# Altium PCB LiFi_transmitter.PcbDoc
Units mil, origin at the board's own origin, x right, y up, seen from the top; angles counter-clockwise.
Board outline 755 x 565 mil, 2 copper layers (Top Layer, Bottom Layer); 24 components, 17 nets, 80 pads, 18 vias.
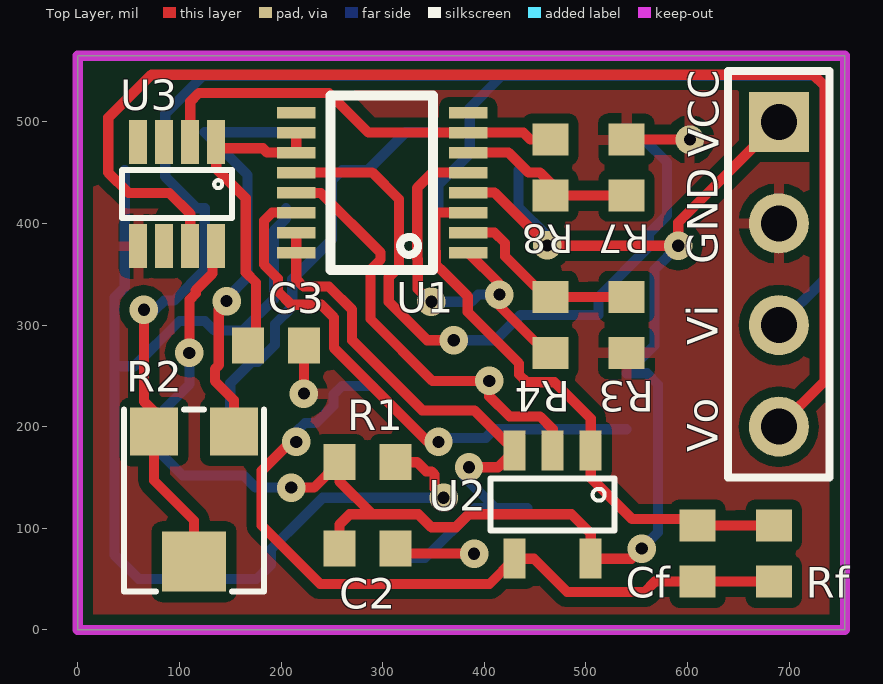
[diagram p0: Top Layer view]
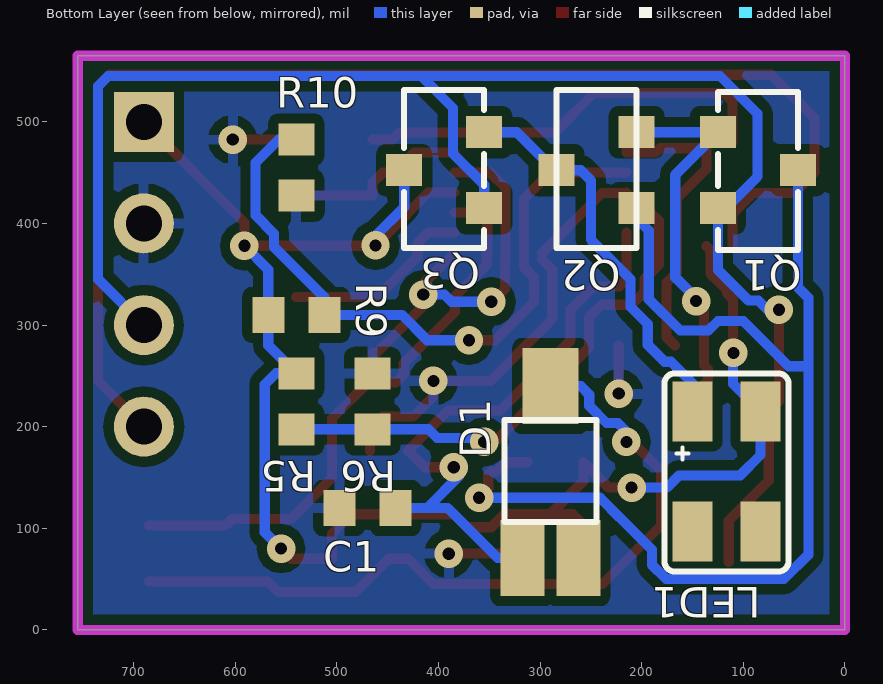
[diagram p1: Bottom Layer view, seen from below]

## Layer stack, top to bottom
Top Solder: solder mask 0.4, Solder Resist, Dk 3.5
Top Layer: signal copper 1.4
Dielectric 1: dielectric 12.6, FR-4, Dk 4.8
Bottom Layer: signal copper 1.4
Bottom Solder: solder mask 0.4, Solder Resist, Dk 3.5

## Board outline
0,0 755,0 755,565 0,565

## Design rules (kind name [scope] priority, off if disabled: settings)
Clearance [All] p1: gap=10 ignorepadtopadclearanceinfootprint=FALSE except(0: Arc-Hole Track-Hole SMDPad-Hole THPad-Hole Via-Hole Fill-Hole Poly-Hole Region-Hole Text-Hole; 6: SMDPad-SMDPad; 8: Arc-Arc Arc-Track Arc-SMDPad Track-Track Track-SMDPad)
PolygonConnect [All] p1: connectstyle=Relief reliefconductorwidth=10 reliefentries=4 polygonreliefangle="90 Angle" airgapwidth=10
RoomDefinition LiFi_transmitter [InComponentClass('LiFi_transmitter')] p1: confinementstyle=ConfineIn formatcopy=TRUE lockcomponents=FALSE outline 0,0 755,0 755,565 0,565
RoutingVias [All] p1: holewidth=12 width=28 viastyle="Through Hole" minholewidth=12 minwidth=28 maxholewidth=28 maxwidth=50
SolderMaskExpansion [All] p1: expansion=4
Width [All] p1: maxlimit=10 minlimit=10 preferedwidth=10
30 further rules are at their usual default settings.

## Components (designator, comment, footprint, x,y, rotation, side; value= is the part's Value field where it differs from the comment)
C1 "Cap" 1608[0603] 470,120 r180 bottom value=1uF
C2 "Cap" 1608[0603] 285,80 r180 top value=1uF
C3 "Cap" 1608[0603] 195,280 r180 top value=1uF
Cf "Cap" 1608[0603] 610,75 r90 top value=0.21pF
D1 "SFH2400FA" SFH2400FA 290,240 r270 bottom
LED1 "SFH4250S" SFH4250S 150,215 r0 bottom
Q1 "MMBTA06L" MMBTA06L 125,489.8 r270 bottom
Q2 "MMBTA06L" MMBTA06L 205,415 r90 bottom
Q3 "MMBTA06L" MMBTA06L 355,415 r90 bottom
R1 "Res1" 1608[0603] 285,165 r180 top value=10K
R2 "TRIMPOT" TC33 153.74,195 r180 top
R3 "Res1" 1608[0603] 540,300 r90 top value=10K
R4 "Res1" 1608[0603] 465,300 r90 top value=20K
R5 "Res1" 1608[0603] 540,225 r90 bottom value=10K
R6 "Res1" 1608[0603] 465,225 r270 bottom value=10K
R7 "Res1" 1608[0603] 540,455 r270 top value=10K
R8 "Res1" 1608[0603] 465,455 r270 top value=20K
R9 "Res1" 1608[0603] 540,310 r0 bottom value=9.7K
R10 "Res1" 1608[0603] 540,455 r90 bottom value=10.3K
Rf "Res1" 1608[0603] 685,75 r90 top value=10K
U1 "LTC6254" LTC6254 384.29,371.26 r90 top
U2 "LMH6629" LMV793 504.8,176.3 r180 top
U3 "TLV3502" TLV3502 136.18,480 r180 top
VCC "Header 4" HDR1X4 690,500 r270 top

## Footprints (in the part's own frame and the unit in brackets; to place one, negate y for a bottom-side part, rotate by r counter-clockwise, add the part's x,y. Pads: shape width x height; smd on the part's side, far side on the other; paste and mask are expansions set on the pad)
1608[0603] [mm] "Chip Capacitor, Body 1.6x0.8mm, IPC High Density"
  rect 0.8x0.9 smd: 1(-0.7,0) 2(0.7,0)
  body extent -0.87,-0.48 0.87,0.48, height 1.3
HDR1X4 [mm] "Connector; Header; 4 Position"
  rect 1.5x1.5 hole 0.9: 1(0,0)
  round 1.5 hole 0.9: 2(2.54,0) 3(5.08,0) 4(7.62,0)
  silkscreen extent -1.27,-1.27 8.89,1.27
LMV793 [mm] "88 MHz, Low Noise, 1.8V CMOS Input, Decompensated Operational Amplifiers"
  rect 0.55x1 smd mask+0.07: 1(0,0) 2(0.95,0) 3(1.9,0) 4(1.9,2.7) 5(0,2.7)
  silkscreen extent -0.6,0.7 2.5,2, body extent -0.5,-0.05 2.4,2.75, height 1.2
LTC6254 [mil] "720MHz, 3.5mA Power Efficient Rail-to-Rail I/O Op Amps"
  rect 11x37.52 smd mask+1.97: 1(0,0) 2(19.69,0) 3(39.37,0) 4(59.06,0) 5(78.74,0) 6(98.43,0) 7(118.11,0) 8(137.8,0) 9(137.8,169.29) 10(118.11,169.29) 11(98.43,169.29) 12(78.74,169.29) 13(59.06,169.29) 14(39.37,169.29) 15(19.69,169.29) 16(0,169.29)
  silkscreen extent -17,35 155,135
MMBTA06L [mm] "Bipolar (BJT) Transistor NPN 80V 500mA 100MHz 225mW Surface Mount SOT-23-3 (TO-236)"
  rect 0.8x0.9 smd mask+0.05: 1(0,0) 2(1.9,0) 3(0.95,2)
  silkscreen extent -1,0 2.95,2
SFH2400FA [mm] "Photodiode 900nm 5ns 120° 3-SMD, Gull Wing"
  rect 1.9x1.4 smd mask+0.08: 1(0,0)
  rect 1.9x1.1 smd mask+0.08: 2(4.3,0.7) 3(4.3,-0.7)
  silkscreen extent 0.85,-1.15 3.4,1.15
SFH4250S [mm] "Infrared (IR) Emitter 860nm 3.1V 100mA 30mW/sr @ 100mA 120° 4-PLCC"
  rect 1x1.5 smd mask+0.05: 1(0,0) 2(-1.7,0) 3(-1.7,3) 4(0,3)
  silkscreen extent -2.4,-0.95 0.7,4
TC33 [mm] "TRIMMER 100 OHM TO 1 MOMH 0.1W SMD"
  rect 1.2x1.2 smd mask+0.05: 1(0,0) 3(2,0)
  rect 1.6x1.5 smd mask+0.05: 2(1,3.25)
  silkscreen extent -0.75,-0.55 2.75,4
TLV3502 [mm] "4.5-ns, Rail-to-Rail, High-Speed Comparator in Microsize Packages"
  rect 0.45x1.1 smd mask+0.05: 1(0,0) 2(0.65,0) 3(1.3,0) 4(1.95,0) 5(1.95,2.6) 6(1.3,2.6) 7(0.65,2.6) 8(0,2.6)
  silkscreen extent -0.4,0.7 2.35,1.9

## Part data
C1 C2 C3 Cf: "Capacitor", LatestRevisionDate=17-Jul-2002, LatestRevisionNote="Re-released for DXP Platform.", PackageDescription="Radial Cap, Thru-Hole; 2 Leads; 0.3 in Pin Spacing", PackageReference=RAD-0.3, Published=8-Jun-2000, Publisher="Altium Limited"
D1: "Photodiode 900nm 5ns 120° 3-SMD, Gull Wing"
LED1: "Infrared (IR) Emitter 860nm 3.1V 100mA 30mW/sr @ 100mA 120° 4-PLCC"
Q1 Q2 Q3: "Bipolar (BJT) Transistor NPN 80V 500mA 100MHz 225mW Surface Mount SOT-23-3 (TO-236)"
R1 R3 R4 R5 R6 R7 R8 R9 R10 Rf: "Resistor", LatestRevisionDate=17-Jul-2002, LatestRevisionNote="Re-released for DXP Platform.", PackageDescription="Axial Device, Thru-Hole; 2 Leads; 0.3 in Pin Spacing", PackageReference=AXIAL-0.3, Published=8-Jun-2000, Publisher="Altium Limited"
R2: library part TC33, "TRIMMER 100 OHM TO 1 MOHM 0.1W SMD"
U1: "IC OPAMP GP 720MHZ RRO 16MSOP"
U2: "IC OPAMP VFB 1GHZ SOT23-5"
U3: "4.5-ns Rail-to-Rail High-Speed Comparator", Code_JEDEC=MO-001-AN, ComponentLink1Description="Manufacturer Link", ComponentLink1URL=http://www.ti.com/, ComponentLink2Description=Datasheet, ComponentLink2URL=http://www-s.ti.com/sc/ds/lf353.pdf, DatasheetVersion=Aug-1994, LatestRevisionDate=04-Mar-2005, LatestRevisionNote="Stylized 3D Model Added.", PackageDescription="DIP; 8 Leads; Row Spacing 7.62 mm; Pitch 2.54 mm", PackageReference=P008, PackageVersion=Jun-1999, Published=16-Jan-2001, Publisher="Altium Limited"
VCC: "Header, 4-Pin", LatestRevisionDate=17-Jul-2002, LatestRevisionNote="Re-released for DXP Platform.", Publisher="Altium Limited"

## Via types
v1: diameter 28, hole 12, Top Layer to Bottom Layer, 18 vias

## Nets (pads, with @x,y where several pads share a name; then routed paths per layer and width w, separated by ;. In a path a pad name is that pad's centre, name@x,y a point inside that pad or via, vN(x,y) a via of type N, cw(c..) or ccw(c..) an arc to the next point about the centre after c; other vN are vias at no path point)
GND: C1.1 C2.1 C3.1 R3.1 R6.1 R7.1 R10.1 U1.13 U2.2 U3.5 VCC.2 | length 620.6
  Top Layer w10: U1.13 215.31,430.01 239.14,430.01 298,371.15 298,364.47 288,354.47 288,305.99 348.99,245 v1(405,245) 405,230 425,210 455,210 467.4,197.6 U2.2 ; v1(222.56,232.56) C3.1 ; C2.1 317.56,75 v1(390,75) ; R7.1 v1(602.44,482.56)
NetCf_1: Cf.1 D1.1 Rf.1 U2.4 | length 773.5
  Top Layer w10: v1(215,185) 215,190.63 181,156.63 181,102.8 238.59,45.21 405.21,45.21 U2.4 449.07,70 481.76,37.32 557.77,37.32 567.9,47.44 Cf.1 647,47.44 Rf.1
  Bottom Layer w10: v1(215,185) 215,195 223.56,203.56 234.57,203.56 251.56,220.55 251.56,231.56 260,240 D1.1
NetCf_2: Cf.2 Rf.2 U1.3 U2.1 | length 572.2
  Top Layer w10: U1.3 352,410.63 352,373.03 352.53,372.49 352.53,359.5 360.15,351.88 383.8,328.23 383.8,312.79 434.28,262.3 434.28,251.31 441.9,243.69 469.18,243.69 504.8,208.07 U2.1 504.8,149.77 545.58,109 603.56,109 Cf.2 647,102.56 Rf.2
NetLED1_1: LED1.1 Q2.3 Q3.2 | length 397
  Bottom Layer w10: LED1.1 150,242.72 171.24,263.96 177.35,263.96 194,280.61 194,300.98 211,317.98 211,345.07 250,384.07 250,442.4 260,452.4 Q2.3 285.5,452.4 322.9,489.8 Q3.2
NetQ1_1: Q1.1 Q2.2 R2.1 | length 413.3
  Top Layer w10: v1(146.43,323.57) 138.69,315.83 138.69,260.61 134.91,256.82 134.91,244.9 153.74,226.07 R2.1
  Bottom Layer w10: v1(146.43,323.57) 146.43,326.5 167,347.07 167,447.8 Q1.1 178.73,489.8 Q2.2
NetQ1_3: Q1.3 Q2.1 R1.1 | length 1115.4
  Top Layer w10: R1.1 333.99,165 342.99,156 348.07,156 351,153.07 351,139 v1(360,130)
  Bottom Layer w10: Q1.3 46.26,337.27 36,327.01 36,259.4 ; Q2.1 205,405 193,393 193,325.44 162.13,294.57 134.42,294.57 124.99,304 100.06,304 55.46,259.4 36,259.4 ; v1(360,130) 240.93,130 239,128.07 239,127.99 222.01,111 221.93,111 190,79.07 190,64.07 175.93,50 60,50 36,74 36,259.4
NetR3_2: R3.2 R4.2 U1.2 | length 189.6
  Top Layer w10: U1.2 410.11,390.95 420.37,380.69 420.37,367.63 460.44,327.56 R4.2 502,327.56 R3.2
NetR4_1: R4.1 U1.1 U1.5 | length 379.3
  Top Layer w10: v1(348.01,323.01) 346.99,323.01 334.53,335.47 334.53,365.04 334,365.57 334,435.07 348.93,450 U1.5 ; U1.1 415,340.55 v1(415,330) 415,318.69 433.69,300 461.25,272.44 R4.1
  Bottom Layer w10: v1(348.01,323.01) 387.07,323.01 394.06,330 v1(415,330)
NetR5_1: R5.1 R6.2 U1.14 | length 537.7
  Top Layer w10: U1.14 191.16,410.63 191.16,410.32 190.86,410.32 183.24,402.71 183.24,359.5 197,345.74 197,333 210,320 239.54,320 252,307.54 252,277.54 344.54,185 v1(355,185)
  Bottom Layer w10: v1(355,185) 359,189 401.44,189 409.88,197.44 R6.2 R5.1
NetR7_2: R7.2 R8.2 U1.6 | length 180.6
  Top Layer w10: U1.6 424,469.69 443.69,450 455,450 465,440 R8.2 R7.2
NetR8_1: R8.1 U1.7 U3.2 | length 416.8
  Top Layer w10: U3.2 110.59,519.86 119.16,528.43 247,528.43 286.06,489.37 U1.7 438.7,489.37 445.51,482.56 R8.1
NetR9_1: R9.1 R10.2 U1.12 | length 677
  Top Layer w10: U1.12 215.31,450.31 289.69,450.31 316,424 316,357.01 306,347.01 306,322.99 343.99,285 v1(370,285)
  Bottom Layer w10: v1(370,285) 411.01,285 436.01,310 R9.1 512.44,327.44 562,377 562,390.01 580,408.01 580,460 557.44,482.56 R10.2
VCC: C2.2 LED1.2 Q3.3 R1.2 R5.2 R9.2 U1.4 U2.5 U3.8 VCC.1 | length 1735.8
  Top Layer w10: v1(109.69,272.62) 110,272.93 110,325.07 116,331.07 116,334.15 124.83,342.98 132.45,350.6 132.45,373.91 U3.8 ; v1(210,140) 232.44,140 R1.2 257.44,146.33 290,113.77 ; C2.2 257.44,103.51 267.7,113.77 290,113.77 ; U1.4 410.28,430.32 450.59,390 ; 430.4,410 450.4,390 ; v1(555,80) 545,70 U2.5 504.8,94.87 485.9,113.77 384.79,113.77 372.01,101 347.99,101 335.21,113.77 290,113.77 ; VCC.1 591,401 v1(591,378) 462.59,378 v1@462,378.59 ; 450.4,390 v1(462,378.4) v1@462,378.59 ; 450.4,390 450.59,390 ; 450.59,390 v1@462,378.59
  Bottom Layer w10: v1(109.69,272.62) 110,272.31 110,241.93 LED1.2 83.07,172.07 103.07,152.07 163,152.07 175.07,140 v1(210,140) ; Q3.3 433.74,416.08 462,387.82 v1(462,378.4) ; v1(555,80) 571,96 571,241.56 560,252.56 R5.2 567.56,280.12 R9.2 567.56,354.56 v1(591,378)
Vi: Q1.2 Q3.1 R2.2 R2.3 VCC.3 | length 1605.6
  Top Layer w10: v1(65,315) 65,225 80,210 70,200 R2.3 75,147 114.37,107.63 R2.2
  Bottom Layer w10: v1(65,315) 76,315 85.07,324.07 94.68,324.07 125,354.4 Q1.2 117.07,415 86,446.07 86,508.07 123,545.07 417.07,545.07 ; Q3.1 355,437.95 385.72,468.67 385.72,513.72 417.07,545.07 ; VCC.3 735,345 735,535.27 725.2,545.07 417.07,545.07
Vo: U3.7 VCC.4 | length 1264.3
  Top Layer w10: U3.7 110.59,409.41 90,430 50,430 30,450 30,504.07 72.36,546.43 723.83,546.43 735,535.27 735,245 VCC.4
Vref: C1.2 D1.3 U1.15 U1.16 U2.3 | length 609.3
  Top Layer w10: U1.15 U1.16 215,345 222,338 247,338 270,315 270,285 339,216 390.3,216 U2.3 413.7,160 386.3,160 v1@385,161.3 ; v1@380,166.3 v1@385,161.3 ; v1(385,160) v1@385,161.3
  Bottom Layer w10: D1.3 341.72,70.71 391.01,120 411.07,120 ; v1(385,160) 385,156.07 380,151.07 411.07,120 ; C1.2 411.07,120
Vref2: C3.2 U1.10 U1.11 U3.1 | length 319.9
  Top Layer w10: U3.1 U3.1@136.18,474.07 ; C3.2 175.43,287.99 175.43,341.85 165.24,352.04 165.24,424.76 136.18,453.82 U3.1@136.18,474.07 ; U1.10 U1.11 186.38,469.69 182,474.07 U3.1@136.18,474.07
pads on no net: D1.2 LED1.3 LED1.4 U1.8 U1.9 U3.3 U3.4 U3.6

## Polygon pours and split planes (outlines as drawn)
GND on Top Layer "GND" (solid, pour order 22): 0,0 0,565 755,565 755,0
GND on Bottom Layer "GND" (solid, pour order 24): 0,0 0,565 755,565 755,15 745,5 750,0

## Keep-outs
Keep-Out Layer:
  the board outline again, w10

## Silkscreen, mask and mechanical layers (free items; w line width, h text height)
Top Overlay:
  text "GND" at 630,360 h30 r90
  text "Vi" at 630,280 h30 r90
  text "Vo" at 630,175 h30 r90
Mechanical 1:
  lines w10: 7.87,0 720.47,0